# Altium PCB DashboardBoard.PcbDoc
Units mm, origin at the board's own origin, x right, y up, seen from the top; angles counter-clockwise.
Board outline 190 x 53.2 mm, 2 copper layers (Top Layer, Bottom Layer); 92 components, 87 nets, 385 pads, 84 vias.
Unrouted connection lines stored in the file: 8.
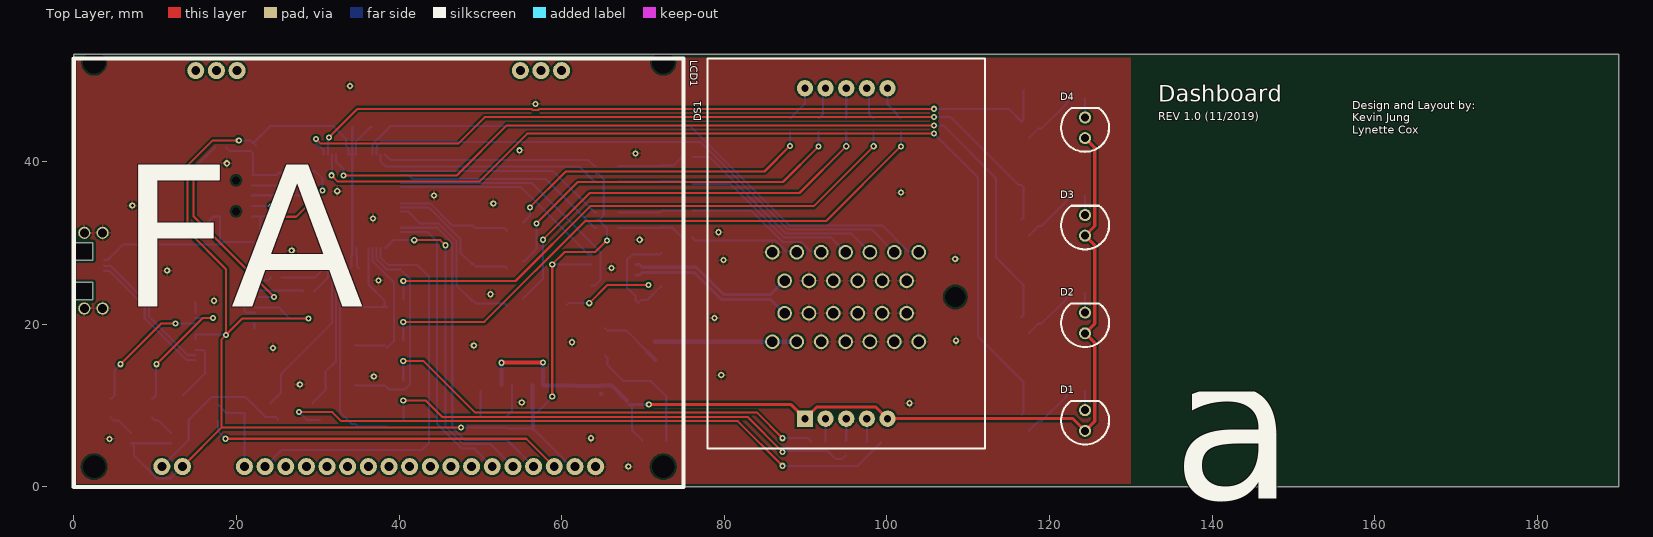
[diagram p0: Top Layer view]
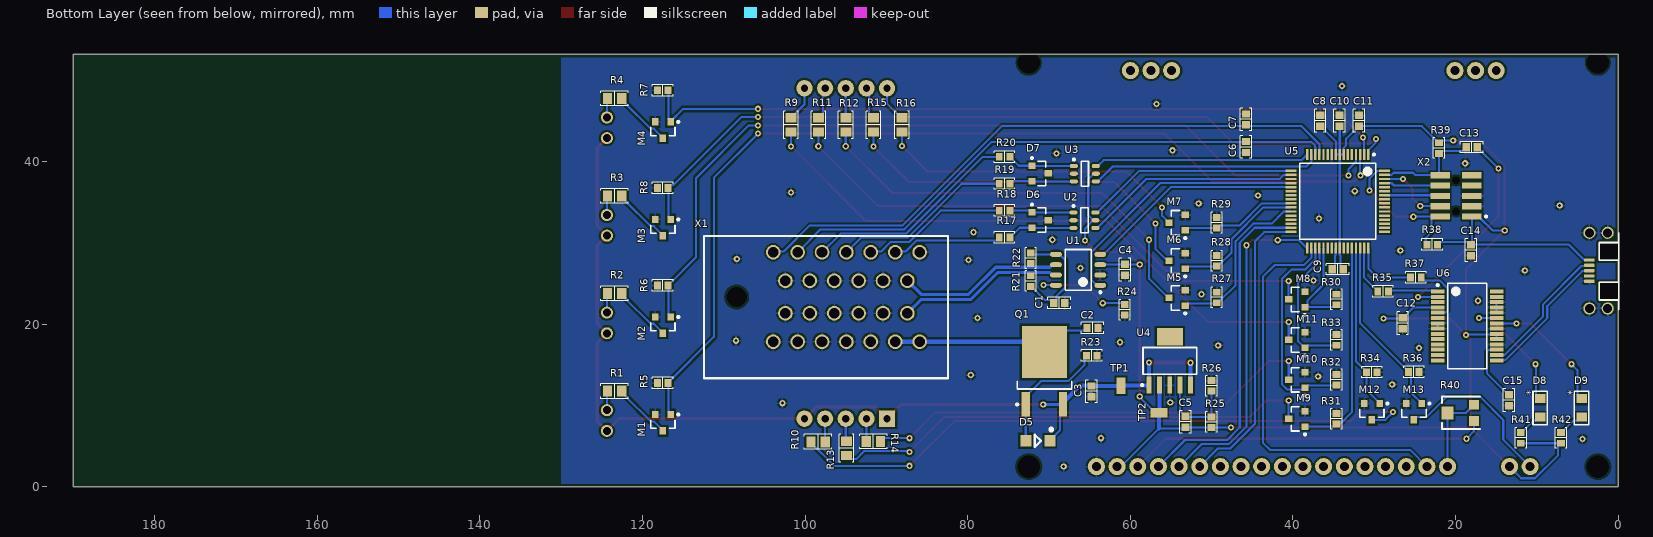
[diagram p1: Bottom Layer view, seen from below]
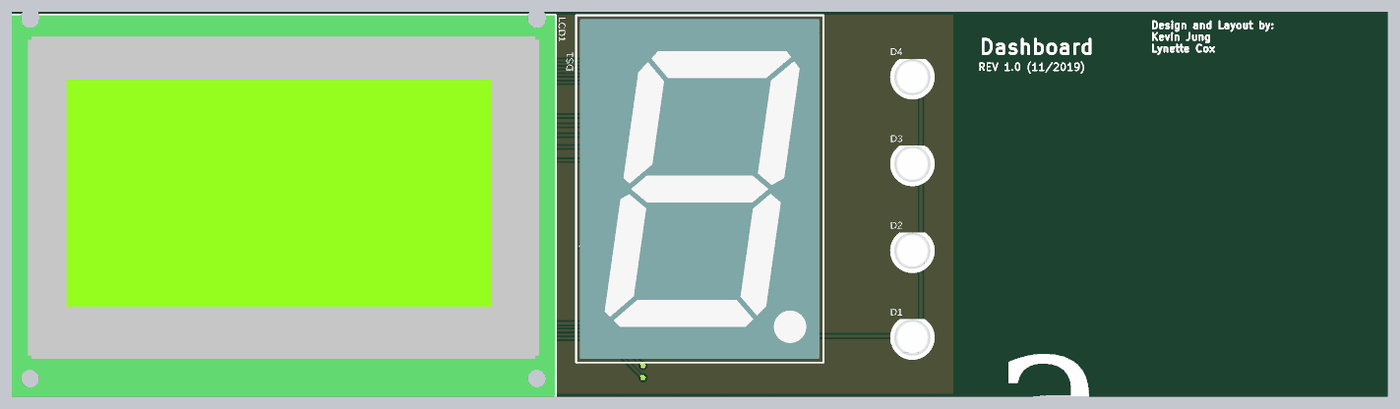
[diagram p2: 3D render of the assembled board from above, using the file's embedded part models]
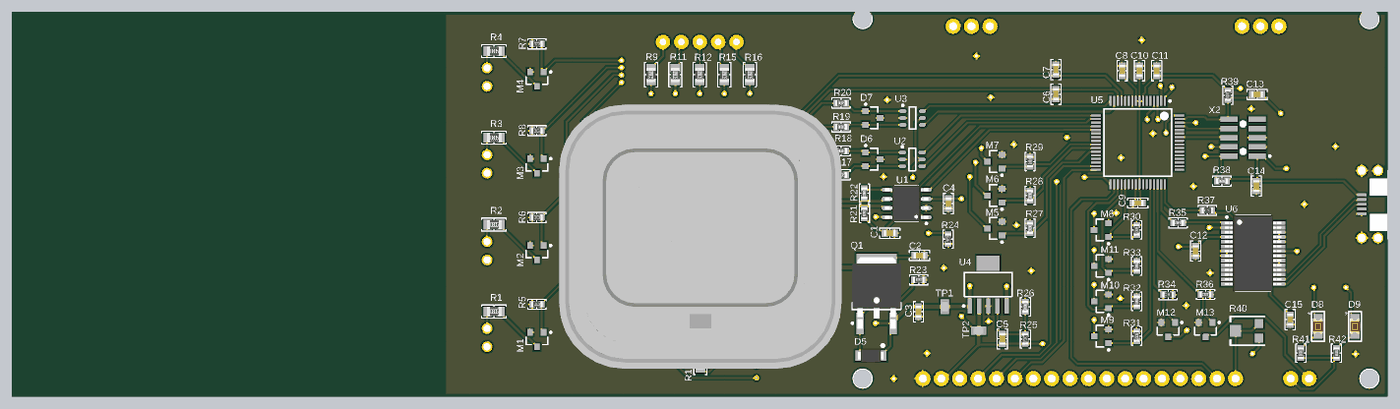
[diagram p3: 3D render of the assembled board from below, using the file's embedded part models]

## Layer stack, top to bottom
Top Solder: solder mask 0.0102, Solder Resist, Dk 3.5
Top Layer: signal copper 0.0356
Dielectric 1: dielectric 0.32, FR-4, Dk 4.8
Bottom Layer: signal copper 0.0356
Bottom Solder: solder mask 0.0102, Solder Resist, Dk 3.5

## Board outline
0,25.15 2.35,25.15 2.35,23 0,23 0,0 190,0 190,53.2 0,53.2 0,30.05 2.35,30.05 2.35,27.9 0,27.9

## Design rules (kind name [scope] priority, off if disabled: settings)
BoardOutlineClearance [All] p1: gap=0.254 ignorepadtopadclearanceinfootprint=FALSE except(0: Arc-SplitContinuation Track-SplitContinuation SMDPad-SplitContinuation THPad-SplitContinuation Via-SplitContinuation Fill-SplitContinuation Poly-SplitContinuation Region-SplitContinuation Text-SplitContinuation; 0.1: Text-OutlineEdge; 0.381: Arc-OutlineEdge Track-OutlineEdge SMDPad-OutlineEdge THPad-OutlineEdge Via-OutlineEdge Fill-OutlineEdge Poly-OutlineEdge Region-OutlineEdge)
Clearance [All] p1: gap=0.254 ignorepadtopadclearanceinfootprint=TRUE except(0: Arc-Hole Track-Hole SMDPad-Hole THPad-Hole Via-Hole Fill-Hole Poly-Hole Region-Hole Text-Hole; 0.203: Arc-Arc Arc-Track Arc-SMDPad Track-Track Track-SMDPad)
DiffPairsRouting [All] p1: maxlimit=0.254 minlimit=0.254 mostfreqgap=0.254 toplayer_minwidth=0.381 toplayer_maxwidth=0.381 toplayer_prefwidth=0.381 bottomlayer_minwidth=0.381 bottomlayer_maxwidth=0.381 bottomlayer_prefwidth=0.381 maxuncoupledlength=12.7
HoleSize [All] p1: absolutevalues=TRUE maxlimit=2.54 minlimit=0.381 maxpercent=80.000 minpercent=20.000
MinimumSolderMaskSliver [All] p1: minsoldermaskwidth=0.1
PolygonConnect [All] p1: connectstyle=Relief reliefconductorwidth=0.254 reliefentries=4 polygonreliefangle="90 Angle" airgapwidth=0.254
RoutingVias [All] p1: holewidth=0.381 width=0.762 viastyle="Through Hole" minholewidth=0.254 minwidth=0.508 maxholewidth=0.711 maxwidth=1.27
SilkToSilkClearance [All] p1: silktosilkclearance=0.1
SilkToSolderMaskClearance [IsPad] p1: minsilkscreentomaskgap=0.1 clearancetoexposedcopper=TRUE
SolderMaskExpansion [All] p1: expansion=0.102
Width [All] p1: maxlimit=0.508 minlimit=0.203 preferedwidth=0.254 minimp=50.000000 maximp=50.000000 favimp=50.000000
25 further rules are at their usual default settings.

## Classes and differential pairs
component class U_12V_to_5V_LDO_1A: C1 C3 R5 R10 TP2 U1
component class U_CAN_5V: C1 C3 R11 R12 R13 U1
component class U_26PinSuperseal: X1
channel class LED_Driver: U_LED_Driver1 U_LED_Driver2 U_LED_Driver3 U_LED_Driver4 U_LED_Driver5 U_LED_Driver6 U_LED_Driver7 U_LED_Driver8 U_LED_Driver9 U_LED_Driver10 U_LED_Driver11 U_LED_Driver12 U_LED_Driver13
component class U_WARNING_LEDS: D5 D7 D8 R4 R10 R13 R23
component class U_RVPOVP: C13 D5 Q1 R23
component class U_MKE1xFxxxVLH: C8 C12 R29 R39 U5 X1
component class U_LED_Driver13: M3 R11
component class U_LED_Driver12: M1 R10
component class U_LED_Driver11: M1 R5
component class U_LED_Driver10: M3 R12
component class U_LED_Driver9: M13 R36
component class U_LED_Driver8: M7 R29
component class U_LED_Driver7: M6 R28
component class U_LED_Driver6: M5 R27
component class U_LED_Driver5: M8 R19
component class U_LED_Driver4: M11 R33
component class U_LED_Driver3: M10 R32
component class U_LED_Driver2: M9 R31
component class U_LED_Driver1: M12 R34
component class U_LCD: R27
component class U_FTDI_USB_UART: C12 C13 C15 D7 D8 R16 R35 R37 R42 U6
component class U_WheelInputConditioning: C13 C15 D7 D8 R19 R27 R28 R29 U5 U6
component class U_7_SEGMENT: DS1 R4 R5 R10 R11 R12 R16 R23
differential pair CAN: +CAN_P -CAN_N

## Components (designator, comment, footprint, x,y, rotation, side; value= is the part's Value field where it differs from the comment)
C1 "capacitor" 0603 68.75,22.6 r180 bottom (schematic designator C4)
C2 "capacitor" 0603 64.65,19.525 r0 bottom (schematic designator C13)
C3 "capacitor" 0603 64.8,11.75 r90 bottom (schematic designator C2)
C4 "capacitor" 0603 60.65,26.7 r90 bottom (schematic designator C3)
C5 "capacitor" 0603 53.2,8 r270 bottom (schematic designator C1)
C6 "capacitor" 0603 45.8,41.8 r270 bottom (schematic designator C14)
C7 "capacitor" 0603 45.8,45.2 r90 bottom (schematic designator C15)
C8 "capacitor" 0603 36.65,45.05 r270 bottom (schematic designator C11)
C9 "capacitor" 0603 34.5,26.775 r180 bottom (schematic designator C12)
C10 "capacitor" 0603 34.263,45.05 r270 bottom (schematic designator C9)
C11 "capacitor" 0603 31.875,45.05 r270 bottom (schematic designator C8)
C12 "capacitor" 0603 26.5,20.125 r90 bottom (schematic designator C5)
C13 "capacitor" 0603 18,41.775 r180 bottom (schematic designator C6)
C14 "capacitor" 0603 18.125,29.125 r90 bottom (schematic designator C10)
C15 "capacitor" 0603 13.45,10.661 r90 bottom (schematic designator C7)
D1 "LED" "LED TH" 124.374,8.169 r90 top locked (schematic designator D6)
D2 "LED" "LED TH" 124.374,20.169 r90 top locked (schematic designator D7)
D3 "LED" "LED TH" 124.374,32.169 r90 top locked (schematic designator D4)
D4 "LED" "LED TH" 124.374,44.169 r90 top locked (schematic designator D5)
D5 "" SOD123F 71.375,5.675 r180 bottom (schematic designator D3)
D6 "AZ23C4V7-7-F Dual Zenner Diodes" SOT23-3 71.1,32.825 r180 bottom (schematic designator D8)
D7 "AZ23C4V7-7-F Dual Zenner Diodes" SOT23-3 71.1,38.55 r180 bottom (schematic designator D9)
D8 "LED" 0805_LED 9.6,9.725 r90 bottom (schematic designator D1)
D9 "LED" 0805_LED 4.5,9.725 r90 bottom (schematic designator D2)
DS1 "" SA15-11EWA 89.92,8.393 r0 top locked
LCD1 "" CFAG12864S 0,0 r0 top locked
M1 "" SOT23-3 117.5,7.899 r270 bottom
M2 "" SOT23-3 117.5,19.899 r270 bottom (schematic designator M1)
M3 "" SOT23-3 117.5,31.899 r270 bottom (schematic designator M1)
M4 "" SOT23-3 117.5,43.899 r270 bottom (schematic designator M1)
M5 "" SOT23-3 54.25,23.248 r0 bottom (schematic designator M1)
M6 "" SOT23-3 54.25,27.798 r0 bottom (schematic designator M1)
M7 "" SOT23-3 54.25,32.498 r0 bottom (schematic designator M1)
M8 "" SOT23-3 39.532,23.053 r0 bottom (schematic designator M1)
M9 "" SOT23-3 39.526,8.375 r0 bottom (schematic designator M1)
M10 "" SOT23-3 39.525,13.177 r0 bottom (schematic designator M1)
M11 "" SOT23-3 39.525,18.075 r0 bottom (schematic designator M1)
M12 "" SOT23-3 30.3,9.252 r270 bottom (schematic designator M1)
M13 "" SOT23-3 25.131,9.252 r270 bottom (schematic designator M1)
Q1 "DMP3010LK3-13" DMP3010LK3-13 70.575,14.25 r90 bottom
R1 "820" "RES 0805/2012" 123.425,11.775 r180 bottom (schematic designator R25)
R2 "820" "RES 0805/2012" 123.425,23.8 r180 bottom (schematic designator R26)
R3 "820" "RES 0805/2012" 123.425,35.8 r180 bottom (schematic designator R23)
R4 "820" "RES 0805/2012" 123.425,47.768 r180 bottom (schematic designator R24)
R5 "10k" "RES 0603/1608" 117.5,12.774 r180 bottom (schematic designator R19)
R6 "10k" "RES 0603/1608" 117.5,24.774 r180 bottom (schematic designator R19)
R7 "10k" "RES 0603/1608" 117.5,48.774 r180 bottom (schematic designator R19)
R8 "10k" "RES 0603/1608" 117.5,36.774 r180 bottom (schematic designator R19)
R9 "470" "RES 0805/2012" 101.725,44.525 r270 bottom (schematic designator R8)
R10 "470" "RES 0805/2012" 98.4,5.55 r180 bottom (schematic designator R7)
R11 "470" "RES 0805/2012" 98.375,44.525 r270 bottom (schematic designator R6)
R12 "680" "RES 0805/2012" 95,44.525 r270 bottom (schematic designator R5)
R13 "470" "RES 0805/2012" 94.92,4.75 r90 bottom (schematic designator R4)
R14 "470" "RES 0805/2012" 91.6,5.575 r0 bottom (schematic designator R2)
R15 "470" "RES 0805/2012" 91.6,44.525 r270 bottom (schematic designator R3)
R16 "470" "RES 0805/2012" 88.075,44.525 r270 bottom (schematic designator R1)
R17 "1k" "RES 0603/1608" 75.475,30.667 r180 bottom (schematic designator R28)
R18 "1k" "RES 0603/1608" 75.475,33.975 r180 bottom (schematic designator R27)
R19 "1k" "RES 0603/1608" 75.475,37.283 r180 bottom (schematic designator R30)
R20 "1k" "RES 0603/1608" 75.475,40.592 r180 bottom (schematic designator R29)
R21 "62" "RES 0603/1608" 72.25,25.325 r270 bottom (schematic designator R12)
R22 "62" "RES 0603/1608" 72.25,28.125 r270 bottom (schematic designator R11)
R23 "10k" "RES 0603/1608" 64.75,16.15 r0 bottom (schematic designator R22)
R24 "100" "RES 0603/1608" 60.69,21.775 r90 bottom (schematic designator R13)
R25 "43k" "RES 0603/1608" 50.025,7.975 r270 bottom (schematic designator R9)
R26 "15k" "RES 0603/1608" 50.025,12.425 r270 bottom (schematic designator R10)
R27 "10k" "RES 0603/1608" 49.375,23.298 r270 bottom (schematic designator R19)
R28 "10k" "RES 0603/1608" 49.375,27.798 r270 bottom (schematic designator R19)
R29 "10k" "RES 0603/1608" 49.375,32.498 r270 bottom (schematic designator R19)
R30 "10k" "RES 0603/1608" 34.657,23.053 r270 bottom (schematic designator R19)
R31 "10k" "RES 0603/1608" 34.651,8.375 r270 bottom (schematic designator R19)
R32 "10k" "RES 0603/1608" 34.65,13.177 r270 bottom (schematic designator R19)
R33 "10k" "RES 0603/1608" 34.65,18.075 r270 bottom (schematic designator R19)
R34 "10k" "RES 0603/1608" 30.3,14.1 r0 bottom (schematic designator R19)
R35 "1k" "RES 0603/1608" 28.925,24.025 r0 bottom (schematic designator R15)
R36 "10k" "RES 0603/1608" 25.131,14.127 r0 bottom (schematic designator R19)
R37 "1k" "RES 0603/1608" 24.875,25.75 r0 bottom (schematic designator R14)
R38 "10k" "RES 0603/1608" 22.875,29.8 r180 bottom (schematic designator R20)
R39 "10k" "RES 0603/1608" 22.05,41.675 r90 bottom (schematic designator R21)
R40 "TC33X-2-103E" 35WR 19.35,9.1 r90 bottom (schematic designator R18)
R41 "1k" "RES 0603/1608" 11.975,6.025 r270 bottom (schematic designator R16)
R42 "1k" "RES 0603/1608" 7.05,6.025 r270 bottom (schematic designator R17)
TP1 "RCU-0C" RCU-0C 61.15,12.45 r0 bottom (schematic designator TP2)
TP2 "RCU-0C" RCU-0C 56.475,9.125 r90 bottom (schematic designator TP1)
U1 "MCP2561 CAN Transceiver" SOIC-8 66.425,26.7 r0 bottom (schematic designator U2)
U2 "74LVC2G17GW" TSOP95P280X110-6N 65.65,32.8 r180 bottom (schematic designator U5)
U3 "74LVC2G17GW" TSOP95P280X110-6N 65.6,38.52 r180 bottom (schematic designator U6)
U4 "LDO-5Pin" SOT223-5 55.15,15.5 r90 bottom (schematic designator U1)
U5 "MKE18F512VLH16" TQFP64 34.5,35.125 r270 bottom (schematic designator U4)
U6 "FT232RL" SSOP-28 18.575,19.8 r180 bottom (schematic designator U3)
X1 "" TE_Amp_6437288-6 94.92,23.364 r270 bottom locked (schematic designator X2)
X2 "CN-2P-M-R10" HDR2X5_SMT 19.95,35.8 r90 bottom (schematic designator X1)

## Footprints (in the part's own frame and the unit in brackets; to place one, negate y for a bottom-side part, rotate by r counter-clockwise, add the part's x,y. Pads: shape width x height; smd on the part's side, far side on the other; paste and mask are expansions set on the pad)
35WR [mm]
  rect 1.2x1.2 smd: 1(-1,-1.6) 3(1,-1.6)
  rect 1.6x1.5 smd: 2(0,1.65)
  silkscreen extent -2,-2.35 2,2.35
0603 [mm]
  rect 0.9x1 smd: 1(-0.675,0) 2(0.675,0)
  silkscreen extent -1.4,-0.7 1.4,0.7, body extent -0.8,-0.41 0.8,0.41, height 0.82
0805_LED [mm]
  rect 1.1x1.3 smd: 1(-1.15,0) 2(1.15,0)
  silkscreen extent -2.06,-0.89 2.03,0.89, body extent -1.05,-0.67 1.05,0.67, height 0.9
CFAG12864S [mm]
  round 2.1 hole 1.1: 1(64.17,2.5) 2(61.63,2.5) 3(59.09,2.5) 4(56.55,2.5) 5(54.01,2.5) 6(51.47,2.5) 7(48.93,2.5) 8(46.39,2.5) 9(43.85,2.5) 10(41.31,2.5) 11(38.77,2.5) 12(36.23,2.5) 13(33.69,2.5) 14(31.15,2.5) 15(28.61,2.5) 16(26.07,2.5) 17(23.53,2.5) 18(20.99,2.5) 19(13.37,2.5) 20(10.83,2.5) ""(15,51.2) ""(17.54,51.2) ""(20.08,51.2) ""(54.92,51.2) ""(57.46,51.2) ""(60,51.2)
  round 0 hole 2.75: 21(2.5,52.2) 22(72.5,52.2) 23(72.5,2.5) 24(2.5,2.5)
  silkscreen extent 0,0 75,52.7, body extent 0,0 75,52.7, height 8.9
DMP3010LK3-13 [mm] "D-PAK, 3-Pads, Body 6.20x6.71mm (max), IPC Medium Density"
  rect 3x1 smd: 1(-4.1,2.29) 2(-4.1,-2.29)
  rect 6.4x5.55 smd: 3(2.35,0)
  silkscreen extent -4.22,-3.35 -1.25,3.47, body extent -4.86,-3.35 5.04,3.35, height 2.39
HDR2X5_SMT [mm] "Header, 10-Leads, Body 3.43x6.35mm, Pitch 1.27mm"
  rect 0.76x2.4 smd: 1(-2.54,-1.95) 2(-2.54,1.95) 3(-1.27,-1.95) 4(-1.27,1.95) 5(0,-1.95) 6(0,1.95) 7(1.27,-1.95) 8(1.27,1.95) 9(2.54,-1.95) 10(2.54,1.95)
  round 0 hole 1 unplated: MH1(-1.905,0) MH2(1.905,0)
  silkscreen extent -2.66,-3.82 -2.42,-3.57, body extent -3.17,-1.72 3.17,1.72, height 4.55
"LED TH" [mm]
  round 1.48 hole 0.98: 1(-1.27,0) 2(1.27,0)
  silkscreen extent -2.95,-2.95 2.42,2.95, body extent -3,-3 2.5,3, height 8.8
RCU-0C [mm]
  rect 1.15x2.05 smd: 1(0,0)
  body extent -0.6,-0.78 0.6,0.82, height 1.16
"RES 0603/1608" [mm] "Chip Resistor, 2-Leads, Body 1.60x0.80mm, IPC Medium Density"
  rect 0.85x0.95 smd: 1(-0.65,0) 2(0.65,0)
  silkscreen extent -1.27,-0.7 1.27,0.7, body extent -0.8,-0.4 0.8,0.4, height 0.45
"RES 0805/2012" [mm] "Chip Resistor, 2-Leads, Body 2.00x1.25mm, IPC Medium Density"
  rect 1.15x1.35 smd: 1(-0.875,0) 2(0.875,0)
  silkscreen extent -1.7,-0.9 1.7,0.9, body extent -0.95,-0.62 1.05,0.63, height 0.6
SA15-11EWA [mm]
  rect 2x2 hole 0.9: 1(0,0)
  round 2 hole 0.9: 2(2.54,0) 3(5.08,0) 4(7.62,0) 5(10.16,0) 6(10.16,40.64) 7(7.62,40.64) 8(5.08,40.64) 9(2.54,40.64) 10(0,40.64)
  silkscreen extent -12,-3.68 22.16,44.32, body extent -11.5,-3.18 21.65,43.82, height 12.5
SOD123F [mm] "SODFL, 2-Leads, Body 1.80x3.50mm, IPC Low Density"
  rect 1.35x1.45 smd: 1(-1.475,0) 2(1.475,0)
  silkscreen extent -0.38,-0.76 1.75,1.5, body extent -1.75,-0.95 1.75,0.95, height 1.15
SOIC-8 [mm] "SOIC, 8-Leads, Body 4.90x3.90mm, Pitch 1.27mm, IPC Medium Density"
  oval 1.45x0.6 smd: 1(-2.725,1.905) 2(-2.725,0.635) 3(-2.725,-0.635) 4(-2.725,-1.905) 5(2.725,-1.905) 6(2.725,-0.635) 7(2.725,0.635) 8(2.725,1.905)
  silkscreen extent -2.85,-2.5 1.6,2.88, body extent -3,-2.5 3,2.5, height 1.75
SOT23-3 [mm] "SOT23, 3-Leads, Body 2.92x2.37mm, Pitch 0.95mm, IPC Medium Density, NUP2105L"
  rect 0.9x0.8 smd: 1(-1,0.95) 2(-1,-0.95) 3(1,0)
  silkscreen extent -1.13,-1.5 0.7,2.02, body extent -0.7,-1.52 0.7,1.52, height 1.11
SOT223-5 [mm] "SOT223-5 TPS7A45 Low-dropout regulator"
  rect 2.1x0.6 smd: 1(-2.975,2.54) 2(-2.975,1.27) 3(-2.975,0) 4(-2.975,-1.27) 5(-2.975,-2.54)
  rect 2.1x3.2 smd: ""(2.975,0)
  silkscreen extent -3.1,-3.3 1.65,3.52, body extent -1.78,-3.27 1.78,3.27, height 1.8
SSOP-28 [mm] "hi"
  rect 1.65x0.49 smd: 1(-3.625,4.225) 2(-3.625,3.575) 3(-3.625,2.925) 4(-3.625,2.275) 5(-3.625,1.625) 6(-3.625,0.975) 7(-3.625,0.325) 8(-3.625,-0.325) 9(-3.625,-0.975) 10(-3.625,-1.625) 11(-3.625,-2.275) 12(-3.625,-2.925) 13(-3.625,-3.575) 14(-3.625,-4.225) 15(3.625,-4.225) 16(3.625,-3.575) 17(3.625,-2.925) 18(3.625,-2.275) 19(3.625,-1.625) 20(3.625,-0.975) 21(3.625,-0.325) 22(3.625,0.325) 23(3.625,0.975) 24(3.625,1.625) 25(3.625,2.275) 26(3.625,2.925) 27(3.625,3.575) 28(3.625,4.225)
  silkscreen extent -3.75,-5.25 2.4,5.25, body extent -3.9,-5.25 3.9,5.25, height 2
TE_Amp_6437288-6 [mm] "TE_Amp_6437288-6"
  round 1.8 hole 1.3: 1(5.5,9) 2(5.5,6) 3(5.5,3) 4(5.5,0) 5(5.5,-3) 6(5.5,-6) 7(5.5,-9) 8(2,7.5) 9(2,4.5) 10(2,1.5) 11(2,-1.5) 12(2,-4.5) 13(2,-7.5) 14(-2,7.5) 15(-2,4.5) 16(-2,1.5) 17(-2,-1.5) 18(-2,-4.5) 19(-2,-7.5) 20(-5.5,9) 21(-5.5,6) 22(-5.5,3) 23(-5.5,0) 24(-5.5,-3) 25(-5.5,-6) 26(-5.5,-9)
  round 0 hole 2.5: 27(0,-13.5)
  silkscreen extent -7.5,-17.5 10,12.5, body extent -17,-19.5 19.5,19.5, height 24.71
TQFP64 [mm] "TSQFP, 64-Leads, Body 10.00x10.00mm, Pitch 0.50mm, IPC Medium Density, MKE18F512VLH16"
  rect 1.35x0.3 smd: 1(-5.75,3.75) 2(-5.75,3.25) 3(-5.75,2.75) 4(-5.75,2.25) 5(-5.75,1.75) 6(-5.75,1.25) 7(-5.75,0.75) 8(-5.75,0.25) 9(-5.75,-0.25) 10(-5.75,-0.75) 11(-5.75,-1.25) 12(-5.75,-1.75) 13(-5.75,-2.25) 14(-5.75,-2.75) 15(-5.75,-3.25) 16(-5.75,-3.75) 33(5.75,-3.75) 34(5.75,-3.25) 35(5.75,-2.75) 36(5.75,-2.25) 37(5.75,-1.75) 38(5.75,-1.25) 39(5.75,-0.75) 40(5.75,-0.25) 41(5.75,0.25) 42(5.75,0.75) 43(5.75,1.25) 44(5.75,1.75) 45(5.75,2.25) 46(5.75,2.75) 47(5.75,3.25) 48(5.75,3.75)
  rect 0.3x1.35 smd: 17(-3.75,-5.75) 18(-3.25,-5.75) 19(-2.75,-5.75) 20(-2.25,-5.75) 21(-1.75,-5.75) 22(-1.25,-5.75) 23(-0.75,-5.75) 24(-0.25,-5.75) 25(0.25,-5.75) 26(0.75,-5.75) 27(1.25,-5.75) 28(1.75,-5.75) 29(2.25,-5.75) 30(2.75,-5.75) 31(3.25,-5.75) 32(3.75,-5.75) 49(3.75,5.75) 50(3.25,5.75) 51(2.75,5.75) 52(2.25,5.75) 53(1.75,5.75) 54(1.25,5.75) 55(0.75,5.75) 56(0.25,5.75) 57(-0.25,5.75) 58(-0.75,5.75) 59(-1.25,5.75) 60(-1.75,5.75) 61(-2.25,5.75) 62(-2.75,5.75) 63(-3.25,5.75) 64(-3.75,5.75)
  silkscreen extent -5.87,-4.67 4.67,4.68, body extent -5,-5 5,5, height 1.6
TSOP95P280X110-6N [mm] "TSOP, 6-Leads, Body 2.90x1.50mm, Pitch 0.95mm, IPC Medium Density"
  oval 1x0.5 smd: 1(-1.35,0.95) 2(-1.35,0) 3(-1.35,-0.95) 4(1.35,-0.95) 5(1.35,0) 6(1.35,0.95)
  silkscreen extent -1.48,-1.55 0.45,1.87, body extent -0.85,-1.55 0.85,1.55, height 1.1

## Part data
C1: library part 1, "Generic 0603 capacitor", capacitance=4700pF, Dielectric=Ceramic, package=0603, percent tolerance=10, voltage=50, ESR=1, id=1, name="0603 Capacitor", quantity=0
C2 C5: library part 1, "Generic 0603 capacitor", capacitance=0.01uF, Dielectric=Ceramic, package=0603, percent tolerance=10, voltage=50, ESR=1, id=1, name="0603 Capacitor", quantity=0
C3 C4 C8 C9 C10 C11 C14: library part 1, "Generic 0603 capacitor", capacitance=0.1uF, Dielectric=Ceramic, package=0603, percent tolerance=10, voltage=50, ESR=1, id=1, name="0603 Capacitor", quantity=0
C6 C7: library part 1, "Generic 0603 capacitor", capacitance=1uF, Dielectric=Ceramic, package=0603, percent tolerance=10, voltage=50, ESR=1, id=1, name="0603 Capacitor", quantity=0
C12 C13 C15: library part 1, "Generic 0603 capacitor", capacitance=0.1uF, id=1
D1 D2 D3 D4: library part 23, "Thru Hole LED", createdby=Andrew, createddate="10/16/2019 10:17:38 PM", id=23, name=LED, numcircuits=1, quantity=1, updatedby=Andrew, updateddate="10/16/2019 10:17:38 PM", vr=2.59999990463257
D5: library part 10, "Zener Diode 14V 500mW ±5% Surface Mount SOD-1", package=SOD-123, id=10, link=https://www.digikey.com/product-detail/en/diodes-incorporated/DDZ9701-7/DDZ9701-7DICT-ND/3877402, name=DDZ9701, quantity=0
D6: library part 14, "DIODE ZENER ARRAY 4.7V SOT23-3", id=14
D7: library part 14, "DIODE ZENER ARRAY 4.7V SOT23-3", package=SOT23-3, id=14, link=https://www.digikey.com/product-detail/en/diodes-incorporated/AZ23C4V7-7-F/AZ23C4V7-FDICT-ND/815309, name=AZ23C4V7-7-F, quantity=0
D8 D9: library part 19, "Generic 0805 LED", id=19
DS1: library part 40, "7SEG DISPLAY 1DIGIT RED 1.5\" CA", voltageinmax=5, createdby=Kevin, id=40, link=https://www.digikey.com/short/pdvmpz, name=SA15-11EWA, quantity=0, vcc=4
LCD1: library part 41, "Sunlight Readable 128x64 SPI or Parallel Graphic LCD", voltageinmax=5.5, createdby=Kevin, id=41, link=https://www.crystalfontz.com/product/cfag12864syyhvt-lcd-graphical-128x64, name=CFAG12864S, quantity=0, vcc=5
M1 M2 M3 M4 M5 M6 M7 M8 M9 M10 M11 M12 M13: library part 6, "MOSFET N-CHANNEL 30V 5A SOT23", current=2.8A, package=SOT-23, id=6, link=https://www.digikey.com/product-detail/en/diodes-incorporated/DMG2302UK-7/DMG2302UK-7DICT-ND/6010163, name=DMG2302UK-7, numcircuits=1, quantity=0, rdson=90mOhm, Type=N_Channel, vdsmax=0, vgsmax=1, vt=800
Q1: library part 26, "P-Channel MOSFET 30V 17A TO252", current=17A, Manufacturer_id=1, package=TO-252-3, createdby=Kevin, Drawer_id=1, id=26, idFuse=3, link=https://www.digikey.com/product-detail/en/diodes-incorporated/DMP3010LK3-13/DMP3010LK3-13DICT-ND/3076574, name=DMP3010LK3-13, numcircuits=1, quantity=0, rdson=8mOhm, Type=P_Channel, vdsmax=30, vgsmax=20
R1 R2 R3 R4 R9 R10 R11 R12 R13 R14 R15 R16: library part 2, package=0805, percent tolerance=5, Power=1/4, createdby=Kevin, id=2, name="0805 Resistor", quantity=0
  R1 R2 R3 R4: resistance=820
  R9 R10 R11 R13 R14 R15 R16: resistance=470
  R12: resistance=680
R5 R6 R7 R8 R21 R22 R23 R24 R25 R26 R27 R28 R29 R30 R31 R32 R33 R34 R35 R36 R37 R38 R39 R41 R42: library part 1, package=0603, percent tolerance=5, id=1, name="0603 Resistor", quantity=0
  R5 R6 R7 R8 R23 R27 R28 R29 R30 R31 R32 R33 R34 R36 R38 R39: resistance=10k
  R21 R22: resistance=62
  R24: resistance=100
  R25: resistance=43k
  R26: resistance=15k
  R35 R37 R41 R42: resistance=1k
R17 R18 R19 R20: library part 1, id=1, resistance=1k
R40: library part 1, "TRIMMER 10K OHM 0.1W J LEAD TOP", package="SOD-23 Bourns", resistance=10, voltage=50, createdby=Kevin, createddate=10/15/2019, Digi-Key_Part_Number=TC33X-103ECT-ND, Digi-Key_Purchase_URL=https://www.digikey.com/product-detail/en/bourns-inc/TC33X-2-103E/TC33X-103ECT-ND/612911?utm_source=snapeda&utm_medium=aggregator&utm_campaign=symbol, id=1, link=https://www.digikey.com/product-detail/en/bourns-inc/TC33X-2-103E/TC33X-103ECT-ND/612911, MF=Bourns, MP=TC33X-2-103E, name=TC33X-2-103E, numcontacts=3, numrows=0, Pitch=0, quantity=0, SnapEDA_Link=https://www.snapeda.com/parts/TC33X-2-103E/Bourns/view-part/?ref=snap
TP1 TP2: library part 14, id=14, link=https://www.digikey.com/product-detail/en/te-connectivity-amp-connectors/RCU-0C/A106145CT-ND/3477802, name=RCU-0C, numcontacts=1, numrows=1, quantity=0
U1: library part 5, package=SOIC-8, id=5, link=https://www.digikey.com/product-detail/en/microchip-technology/MCP2561T-E-SN/MCP2561T-E-SNCT-ND/5148846, name=null, quantity=0, Type=CAN, vcc=0
U2 U3: library part 17, "Buffer, Non-Inverting 2 Element 1 Bit per Element Push-Pull Output 6-TSSOP", package=SOT457, createdby=Nolan, createddate="10/16/2019 10:08:58 PM", id=17, name=74LVC2G17, quantity=0, Type=buffer, updatedby=Nolan, updateddate="10/16/2019 10:08:58 PM", vcc=5
U4: library part 7, "1.3V-5V 1.A", package=SOT-223-6, id=7, imax=1, link=https://www.digikey.com/product-detail/en/texas-instruments/REG104GA-A/REG104GA-A-ND/380288?utm_adgroup=Integrated%20Circuits&slid=&gclid=CjwKCAjwpKveBRAwEiwAo4Pqm3P1cbCGhU8VzQ4hsaig_pQLQzWQ1vPK7ianKpgKPxk_g8_0T-ULMBoCGh8QAvD_BwE, name=REG104GA-A, quantity=0
U5: library part 1, "32b NXP Microcontroller", package=TQFP64, voltagemax=5.5, voltagemin=2.70000004768372, id=1, name=MKE18F512VLH16, quantity=0
U6: library part 3, id=3
X1: library part 7, "AMP SuperSeal Straight", id=7, link=https://www.digikey.com/product-detail/en/te-connectivity-amp-connectors/6437288-6/A123256-ND/2329274, name=6437288-6, numcontacts=26, numrows=4, Pitch=3mm, quantity=0
X2: library part 4, "CONN_TE_2X5POS", id=4, link=https://www.digikey.com/product-detail/en/5103309-1/A33160-ND/1114898?utm_campaign=buynow&WT.z_cid=ref_octopart_dkc_buynow&utm_medium=aggregator&curr=usd&site=us&utm_source=octopart, name=5103309-1, numcontacts=10, numrows=2, Pitch=2.54mm, quantity=0

## Free pads (board coordinates)
  round 1.5 hole 1.1: 0(1.3,21.95) 0(1.3,31.25) 0(3.55,21.95) 0(3.55,31.25)
  rrect50% 1.3x0.4 smd far side: 1(3.55,27.9) 2(3.55,27.25) 3(3.55,26.6) 4(3.55,25.95) 5(3.55,25.3)

## Via types
v1: diameter 0.762, hole 0.381, Top Layer to Bottom Layer, 84 vias

## Nets (pads, with @x,y where several pads share a name; then routed paths per layer and width w, separated by ;. In a path a pad name is that pad's centre, name@x,y a point inside that pad or via, vN(x,y) a via of type N, cw(c..) or ccw(c..) an arc to the next point about the centre after c; other vN are vias at no path point)
3V3_OUT: C15.2 U6.17 | length 7.8
  Bottom Layer w0.254: C15.2@13.45,11.275 13.45,11.286 16.156,13.992 16.156,16.628 15.933,16.851 14.974,16.851 U6.17
5V: C4.2 C5.2 C8.2 C9.2 C10.2 C11.2 C12.2 C14.2 LCD1.2 LCD1.19 pad.1 R25.2 R38.2 R39.2 R41.2 R42.2 TP2.1 U1.3 U2.5 U3.5 U4.2 U5.7 U5.8 U5.9 U5.41 U6.4 U6.19 U6.20 X2.1 | length 246.4
  Top Layer w0.254: LCD1.19 18.195,7.325 ; v1(20.3,42.625) 17.097,42.625 13.963,39.491 v1(13.963,31.545) 18.725,26.783 v1(18.725,18.7) ; v1(28.875,20.725) 20.75,20.725 v1(18.725,18.7) ; v1(47.625,7.325) 18.195,7.325 ; v1(58.85,11.125) v1(58.85,27.375) 60.375,28.9 64.156,28.9 v1(65.575,30.319) ; 18.195,7.325 18.195,18.152 18.725,18.682 v1(18.725,18.7)
  Bottom Layer w0.254: pad.1@3.7,27.9 4.15,27.9 6.05,29.8 C14.2@18.05,29.8 ; R42.2 R42.2@7.1,5.375 ; R41.2 R42.2@7.1,5.375 ; LCD1.19 11.939,1.069 10.237,1.069 7.398,3.908 7.398,5.077 R42.2@7.1,5.375 ; v1(13.963,31.545) 15.465,31.545 17.18,33.26 X2.1 18,29.85 C14.2@18.05,29.8 ; U6.19 U6.20 15.012,18.763 18.662,18.763 v1(18.725,18.7) ; C14.2 C14.2@18.05,29.8 ; v1(20.3,42.625) 21.7,42.625 22,42.325 R39.2 22.1,42.325 24.15,44.375 C11.2 31.925,44.375 33.462,42.838 33.462,42.027 33.781,41.708 U5.7@33.781,40.875 ; U6.4 25.175,22.075 26.525,20.725 v1(28.875,20.725) ; R39.2@22.3,42.125 R39.2@22.398,42.027 ; R38.2@22.375,29.75 22.375,29.8 22.077,30.098 18.348,30.098 C14.2@18.05,29.8 ; U5.7 U5.7@33.781,40.875 ; C9.2 34.148,27.098 34.148,28.409 34.25,28.511 U5.41 U5.8 ; C10.2@34.262,44.25 34.25,44.237 U5.8 ; C8.2@36.65,44.25 36.475,44.25 34.719,42.494 34.719,40.875 U5.8 ; v1(47.625,7.325) R25.2 C5.2 53.35,7.175 56.5,7.175 ; 56.46,7.215 56.5,7.175 ; TP2.1 56.925,9.125 58.85,11.05 v1(58.85,11.125) ; v1(58.85,27.375) C4.2 60.69,27.335 U1.3 ; LCD1.2 61.175,2.5 56.5,7.175 ; U3.5 64.5,38.52 65.181,37.839 65.181,33.431 U2.5@64.55,32.8 ; U2.5 U2.5@64.55,32.8 ; v1(65.575,30.319) 65.575,31.775 U2.5@64.55,32.8 ; U5.7@33.781,40.875 U5.8
  Bottom Layer w0.508: TP2.1@56.42,9.165 U4.2 ; 56.46,7.215 TP2.1@56.46,9.045
7SEG_a: DS1.7 R11.1 | length 4
  Bottom Layer w0.254: DS1.7 97.827,48.746 97.827,45.848 98.275,45.4 R11.1
7SEG_a_SIG: M8.1 R30.2 U5.37 | length 12.2
  Bottom Layer w0.254: R30.2 34.955,22.105 38.53,22.105 M8.1 ; U5.37 36.25,24.896 38.209,22.937 38.209,22.376 M8.1@38.48,22.105
7SEG_b: DS1.6 R9.1 | length 4.4
  Bottom Layer w0.254: DS1.6 100.08,47.045 101.177,45.948 101.177,45.848 101.625,45.4 R9.1
7SEG_b_SIG: M11.1 R33.2 U5.36 | length 17.7
  Bottom Layer w0.254: R33.2 34.677,17.398 38.252,17.398 M11.1 38.575,17.125 39.363,17.913 39.363,25.15 36.758,27.755 36.758,27.935 36.75,27.943 U5.36
7SEG_c: DS1.4 R10.2 | length 2.8
  Bottom Layer w0.254: R10.2 97.54,5.565 DS1.4
7SEG_c_SIG: M12.1 R34.2 U5.45 | length 20.3
  Bottom Layer w0.254: M12.1 29.35,10.302 30.95,11.902 R34.2 30.95,14.15 32.25,15.45 U5.45
7SEG_d: DS1.3 R13.2 | length 2.8
  Bottom Layer w0.254: R13.2 95,5.705 DS1.3
7SEG_d_SIG: M9.1 R31.2 U5.44 | length 26.7
  Bottom Layer w0.254: U5.44 32.75,28.511 32.758,28.503 32.758,9.192 34.225,7.725 R31.2 34.949,7.427 38.526,7.427 M9.1
7SEG_DP: DS1.8 R12.1 | length 3.6
  Bottom Layer w0.254: R12.1 DS1.8
7SEG_DP_SIG: M5.1 R27.2 U5.27 | length 21
  Bottom Layer w0.254: U5.27 41.114,33.875 42.606,32.383 44.91,32.383 47.058,30.235 47.058,24.826 48.938,22.946 49.077,22.946 R27.2 49.452,22.571 52.977,22.571 M5.1
7SEG_e: DS1.2 R14.2 | length 2.8
  Bottom Layer w0.254: DS1.2 92.46,5.59 R14.2
7SEG_e_SIG: M10.1 R32.2 U5.35 | length 26.6
  Bottom Layer w0.254: R32.2 34.677,12.5 38.252,12.5 M10.1 38.752,12 40.737,12 41.363,12.626 41.363,25.578 40.175,26.767 38.465,26.767 37.25,27.982 U5.35
7SEG_f: DS1.9 R15.1 | length 4
  Bottom Layer w0.254: R15.1 91.7,45.4 92.148,45.848 92.148,48.721 DS1.9
7SEG_f_SIG: M6.1 R28.2 U5.26 | length 17.1
  Bottom Layer w0.254: U5.26 43.637,34.375 47.566,30.446 47.566,28.818 48.938,27.446 49.077,27.446 R28.2 49.402,27.121 52.977,27.121 M6.1
7SEG_g: DS1.10 R16.1 | length 4.5
  Bottom Layer w0.254: R16.1 88.175,45.4 89.92,47.145 DS1.10
7SEG_g_SIG: M7.1 R29.2 U5.25 | length 14.4
  Bottom Layer w0.254: U5.25 41.114,34.875 41.122,34.883 43.847,34.883 46.584,32.146 49.077,32.146 49.402,31.821 52.977,31.821 M7.1
12V: C3.2 D1.1 D2.1 D3.1 D4.1 D5.2 DS1.1 DS1.5 Q1.2 TP1.1 U4.1 U4.5 | length 124.5
  Top Layer w0.381: v1(70.721,10.15) 88.163,10.15 DS1.1 91.365,9.838 98.635,9.838 DS1.5 122.88,8.393 D1.1 125.559,8.084 125.559,17.714 D2.1 125.559,20.084 125.559,29.714 D3.1 125.559,32.084 125.559,41.714 D4.1
  Top Layer w0.508: v1(52.6,15.275) 52.617,15.293 57.673,15.293 v1(57.69,15.31)
  Bottom Layer w0.254: Q1.2 68.658,9.777 68.658,6.967 69.9,5.725 D5.2
  Bottom Layer w0.381: Q1.2 v1(70.721,10.15)
  Bottom Layer w0.508: v1(52.6,15.275) 52.605,15.27 52.605,12.53 U4.5 ; v1(57.69,15.31) U4.1 57.736,12.479 61.5,12.479 61.554,12.425 C3.2@64.746,12.425 ; C3.2@64.8,12.479 66.171,12.479 Q1.2@68.05,10.6
12V_HARNESS: C2.2 Q1.3 X1.1 X1.2 | length 25.3
  Bottom Layer w0.254: C2.2 65.602,19.248 67.927,19.248 Q1.3
  Bottom Layer w0.508: Q1.3 Q1.3@71.561,15.614 ; Q1.3@71.436,17.864 X1.1 X1.2
B1_Conditioned: U2.6 U5.17 | length 26.2
  Bottom Layer w0.254: U5.17 58.925,38.875 64.05,33.75 U2.6
B1_Harness: R18.1 X1.22 | length 17.9
  Bottom Layer w0.254: R18.1 83.339,33.975 87.169,30.145 89.451,30.145 90.639,28.957 91.827,28.957 X1.22
B2_Conditioned: U2.4 U5.18 | length 26.8
  Bottom Layer w0.254: U5.18 41.114,38.375 41.606,37.883 58.017,37.883 64.05,31.85 U2.4
B2_Harness: R17.1 X1.21 | length 13.6
  Bottom Layer w0.254: R17.1 76.125,30.617 76.423,30.319 86.277,30.319 87.639,28.957 88.827,28.957 X1.21
B3_Conditioned: U3.6 U5.16 | length 26.6
  Bottom Layer w0.254: U5.16@38.281,40.875 38.96,40.196 63.274,40.196 64,39.47 U3.6
B3_Harness: R20.1 X1.24 | length 26.7
  Bottom Layer w0.254: R20.1 78.159,40.592 87.59,31.161 95.623,31.161 X1.24
B4_Conditioned: U3.4 U5.15 | length 28.4
  Bottom Layer w0.254: U5.15 37.75,40.011 38.355,39.406 62.164,39.406 64,37.57 U3.4
B4_Harness: R19.1 X1.23 | length 22.3
  Bottom Layer w0.254: R19.1 80.749,37.283 87.379,30.653 93.131,30.653 X1.23
CAN_N: R22.2 U1.6 X1.14 | length 20.5
  Bottom Layer w0.381: U1.6 69.59,27.335 69.908,27.017 76.563,27.017 79.899,23.681 85.737,23.681 X1.14
CAN_P: R21.1 U1.7 X1.8 | length 20.5
  Bottom Layer w0.381: U1.7 69.59,26.065 69.908,26.382 76.299,26.382 79.635,23.046 85.738,23.046 X1.8
CBUS0: D8.2 U6.23 | length 16
  Top Layer w0.254: v1(10.175,15.1) 15.85,20.775 v1(17.125,20.775)
  Bottom Layer w0.254: D8.2 9.7,10.875 10.123,11.298 10.123,15.048 v1(10.175,15.1) ; U6.23 v1(17.125,20.775)
CBUS1: D9.2 U6.22 | length 16.1
  Top Layer w0.254: v1(5.75,15.1) 10.75,20.1 v1(12.5,20.1)
  Bottom Layer w0.254: D9.2 4.6,10.875 5.023,11.298 5.023,14.373 v1(5.75,15.1) ; v1(12.5,20.1) 12.513,20.113 14.937,20.113 U6.22
GND: C1.2 C2.1 C3.1 C4.1 C6.2 C7.2 C8.1 C9.1 C10.1 C11.1 C12.1 C14.1 C15.1 D6.3 D7.3 LCD1.1 M1.2 M2.2 M3.2 M4.2 M5.2 M6.2 M7.2 M8.2 M9.2 M10.2 M11.2 M12.2 M13.2 pad.0 pad.5 R5.1 R6.1 R7.1 R8.1 R23.1 R24.1 R26.1 R27.1 R28.1 R29.1 R30.1 R31.1 R32.1 R33.1 R34.1 R36.1 U1.2 U2.2 U3.2 U4.3 U5.10 U5.40 U6.7 U6.8 U6.18 U6.21 U6.24 U6.25 U6.26 X1.3 X1.4 X1.5 X1.6 X1.7 X1.9 X1.10 X1.11 X1.12 X1.13 X1.15 X1.16 X1.17 X1.18 X1.19 X1.20 X2.3 X2.5 | length 4.6
  Bottom Layer w0.254: U6.24 U6.25 U6.26 ; U6.8 U6.7 ; U5.40 34.75,28.511 34.852,28.409 34.852,27.098 C9.1@35.059,26.891
  Bottom Layer w0.508: C3.1@64.821,11.45 C3.1@64.875,11.504
  other v1: 68.2,2.5 4.4,5.9 63.6,6 102.8,10.3 55.1,10.4 27.8,12.6 36.9,13.592 79.635,13.75 24.5,17.1 49.2,17.4 61.29,17.8 108.5,17.991 78.8,20.775 17.258,22.9 51.249,23.703 37.475,25.402 11.488,26.6 66.125,26.917 79.899,27.9 108.4,28.041 26.8,29.068 69.6,30.4 79.3,31.325 36.8,33.031 7.2,34.6 51.6,34.875 44.3,35.844 101.725,36.2 32.4,36.375 18.825,39.8 69.102,41.025 54.8,41.4 56.8,47.1 33.957,49.3
JTAG_RST: C13.1 R39.1 U5.63 X2.10 | length 13.4
  Bottom Layer w0.254: C13.1@18.725,41.825 18.725,41.775 19.177,41.323 21.752,41.323 R39.1 ; X2.10 22.025,38.465 R39.1@22.025,41.025 ; X2.10@22.025,38.34 24.928,38.34 25.225,38.637 27.624,38.637 27.886,38.375 U5.63
JTAG_TCLK: U5.62 X2.4 | length 8.9
  Top Layer w0.254: v1(24.35,34.55) 25.3,35.5 25.3,36.7 v1(26.475,37.875)
  Bottom Layer w0.254: X2.4 21.91,34.54 24.34,34.54 v1(24.35,34.55) ; v1(26.475,37.875) U5.62
JTAG_TDI: U5.61 X2.8 | length 7
  Bottom Layer w0.254: X2.8 27.581,37.07 27.886,37.375 U5.61
JTAG_TDO: U5.58 X2.6 | length 6.9
  Bottom Layer w0.254: X2.6 21.975,35.875 U5.58
JTAG_TMS: R38.1 U5.64 X2.2 | length 17.6
  Top Layer w0.254: v1(25.2,33.225) 27.35,33.225 v1(30.6,36.475)
  Bottom Layer w0.254: X2.2 22.72,33.26 X2.2@22.738,33.242 ; R38.1@23.675,29.75 23.675,30.606 22.973,31.308 22.973,33.007 X2.2@22.738,33.242 ; v1(25.2,33.225) 25.183,33.242 X2.2@22.738,33.242 ; U5.64 29.614,38.875 30.6,37.889 v1(30.6,36.475)
LCD_BL: M13.1 R36.2 U5.46 | length 22.3
  Bottom Layer w0.254: M13.1 24.181,10.302 25.483,11.604 25.483,13.829 R36.2 25.781,14.177 31.742,20.138 31.742,25.524 31.758,25.54 31.758,28.503 31.75,28.511 U5.46
LCD_RESET: LCD1.17 U5.34 | length 49.9
  Bottom Layer w0.254: LCD1.17 25.58,4.55 42.825,4.55 43.7,5.425 43.7,25.85 42.275,27.275 38.675,27.275 37.75,28.2 U5.34
LCD_SPI_CLK: LCD1.6 U5.32 | length 36.3
  Bottom Layer w0.254: U5.32@40.25,31.344 43.556,31.344 44.675,30.225 44.675,7.761 47.682,4.753 49.217,4.753 LCD1.6
LCD_SPI_CS: LCD1.4 U5.31 | length 41.8
  Bottom Layer w0.254: U5.31 44.7,31.875 46.55,30.025 46.55,7.322 48.103,5.769 53.281,5.769 LCD1.4
LCD_SPI_SDA: LCD1.5 U5.33 | length 40.7
  Top Layer w0.254: v1(41.875,30.35) 45.075,30.35 v1(45.7,29.725)
  Bottom Layer w0.254: U5.33@38.281,29.375 39.256,30.35 v1(41.875,30.35) ; v1(45.7,29.725) 45.7,7.454 47.893,5.261 51.249,5.261 LCD1.5
LDO_ADJ: C5.1 R25.1 R26.2 U4.4 | length 10.5
  Bottom Layer w0.254: R26.2 R25.1 53.15,8.625 C5.1 53.25,8.675 53.573,8.998 53.573,9.048 53.88,9.355 U4.4
LED1: M3.1 R8.2 U5.1 | length 98.6
  Top Layer w0.254: v1(29.775,42.8) 30.362,42.213 47.263,42.213 50.533,45.483 v1(105.8,45.483)
  Bottom Layer w0.254: v1@30,42.7 29.872,42.572 29.872,42.278 30.727,41.423 30.727,40.898 U5.1 ; v1(105.8,45.483) 107.842,45.483 116.203,37.122 116.552,37.122 116.85,36.824 R8.2 116.823,36.747 116.823,33.172 M3.1
LED2: M4.1 R7.2 U5.2 | length 93.3
  Top Layer w0.254: v1(31.375,42.975) 34.899,46.499 56.323,46.499 56.484,46.338 57.116,46.338 57.277,46.499 v1(105.8,46.499)
  Bottom Layer w0.254: U5.2 v1@31.25,42.7 ; v1(105.8,46.499) 115,46.499 116.55,44.949 M4.1 116.823,45.172 116.823,48.747 R7.2
LED3: M1.1 R5.2 U5.3 | length 118.7
  Top Layer w0.254: v1(31.7,38.325) 32.487,37.538 49.86,37.538 55.773,43.451 v1(105.8,43.451)
  Bottom Layer w0.254: v1(31.7,38.325) 31.75,38.375 U5.3 ; v1(105.8,43.451) 111.225,38.026 111.225,18.449 116.823,12.851 116.823,9.172 M1.1
LED4: M2.1 R6.2 U5.4 | length 107.1
  Top Layer w0.254: v1(33.175,38.3) 47.1,38.3 53.267,44.467 v1(105.8,44.467)
  Bottom Layer w0.254: U5.4 32.25,40.011 33.175,39.086 v1(33.175,38.3) ; v1(105.8,44.467) 106.933,44.467 113.4,38 113.4,28.274 116.85,24.824 R6.2 116.823,24.747 116.823,21.172 M2.1
LED_Negative_U_LED_Driver1: M12.3 R10.1 | length 78.6
  Top Layer w0.254: v1(27.7,9.2) 31.8,9.2 32.913,8.087 81.682,8.087 v1(87.169,2.6)
  Bottom Layer w0.254: v1(27.7,9.2) 28.648,8.252 M12.3 ; v1@87.2,2.6 96.425,2.6 99.275,5.45 R10.1
LED_Negative_U_LED_Driver2: M9.3 R13.1 | length 59.8
  Top Layer w0.254: v1(40.526,10.626) 43.274,10.626 45.305,8.595 82.874,8.595 87.138,4.331 v1@87.2,4.331
  Bottom Layer w0.254: M9.3 v1(40.526,10.626) ; v1@87.2,4.4 92.754,4.4 93.727,3.427 94.472,3.427 R13.1
  other v1: 87.169,4.3
LED_Negative_U_LED_Driver3: M10.3 R14.1 | length 56.6
  Top Layer w0.254: v1(40.525,15.5) 43,15.5 49.319,9.181 83.988,9.181 v1(87.169,6)
  Bottom Layer w0.254: M10.3 v1(40.525,15.5) ; v1(87.169,6) 90.3,6 R14.1
LED_Negative_U_LED_Driver4: M11.3 R9.2 | length 74.1
  Top Layer w0.254: v1(40.525,20.293) 50.493,20.293 62.9,32.7 92.55,32.7 v1(101.725,41.875)
  Bottom Layer w0.254: M11.3 v1(40.525,20.293) ; v1(101.725,41.875) R9.2
LED_Negative_U_LED_Driver5: M8.3 R11.2 | length 68.7
  Top Layer w0.254: v1(40.532,25.332) 54.332,25.332 63.531,34.531 91.006,34.531 v1(98.375,41.9)
  Bottom Layer w0.254: M8.3 v1(40.532,25.332) ; v1(98.375,41.9) R11.2
LED_Negative_U_LED_Driver6: M5.3 R12.2 | length 52.2
  Top Layer w0.254: v1(57.7,30.4) 63.45,36.15 89.25,36.15 v1(95,41.9)
  Bottom Layer w0.254: M5.3 55.298,23.2 57.7,25.602 v1(57.7,30.4) ; R12.2@94.9,43.65 R12.2 v1(95,41.9)
LED_Negative_U_LED_Driver7: M6.3 R15.2 | length 45.9
  Top Layer w0.254: v1(56.9,32.4) 62,37.5 87.225,37.5 v1(91.6,41.875)
  Bottom Layer w0.254: M6.3 55.252,27.8 55.352,27.7 56.9,29.248 v1(56.9,32.4) ; v1(91.6,41.875) R15.2
LED_Negative_U_LED_Driver8: M7.3 R16.2 | length 39.1
  Top Layer w0.254: v1(56.1,34.375) 60.525,38.8 84.95,38.8 v1(88.075,41.925)
  Bottom Layer w0.254: M7.3 56.1,33.348 v1(56.1,34.375) ; v1(88.075,41.925) R16.2
LED_Negative_U_LED_Driver9: LCD1.20 M13.3 | length 20.5
  Bottom Layer w0.254: LCD1.20 14.14,5.81 14.14,8.229 16.992,11.081 21.108,11.081 23.614,8.575 24.858,8.575 25.131,8.302 M13.3
LED_Negative_U_LED_Driver10: M2.3 R2.2 | length 7.2
  Bottom Layer w0.254: M2.3 117.5,18.949 118.619,20.068 119.008,20.068 122.102,23.162 122.102,23.352 R2.2
LED_Negative_U_LED_Driver11: M1.3 R1.2 | length 7.2
  Bottom Layer w0.254: M1.3 117.5,6.949 118.619,8.068 119.008,8.068 122.102,11.162 122.102,11.327 R1.2
LED_Negative_U_LED_Driver12: M4.3 R4.2 | length 7.2
  Bottom Layer w0.254: M4.3 117.5,42.949 118.619,44.068 119.008,44.068 122.102,47.162 122.102,47.32 R4.2
LED_Negative_U_LED_Driver13: M3.3 R3.2 | length 7.2
  Bottom Layer w0.254: M3.3 117.5,30.949 118.619,32.068 119.008,32.068 122.102,35.162 122.102,35.352 R3.2
NetC6_2: C13.2 U6.2 | length 26.1
  Top Layer w0.254: v1(14.725,39.175) 14.725,33.275 v1(24.625,23.375)
  Bottom Layer w0.254: v1(14.725,39.175) 14.775,39.175 17.375,41.775 C13.2@17.375,41.825 ; U6.2 v1(24.625,23.375)
NetD1_1: D8.1 R41.1 | length 3.2
  Bottom Layer w0.254: D8.1 10.023,8.152 10.448,8.152 11.925,6.675 R41.1
NetD2_1: D9.1 R42.1 | length 3.3
  Bottom Layer w0.254: D9.1 4.923,8.152 5.523,8.152 7,6.675 R42.1
NetD3_1: D5.1 Q1.1 R23.2 | length 15.6
  Bottom Layer w0.254: R23.2@65.325,16.15 65.623,15.852 65.623,15.038 67.642,13.019 70.996,13.019 72.865,11.15 72.865,5.69 D5.1
NetD4_2: D3.2 R3.1 | length 2.4
  Bottom Layer w0.254: R3.1 124.374,35.726 D3.2
NetD5_2: D4.2 R4.1 | length 2.4
  Bottom Layer w0.254: R4.1 124.374,47.694 D4.2
NetD6_2: D1.2 R1.1 | length 2.4
  Bottom Layer w0.254: R1.1 124.374,11.701 D1.2
NetD7_2: D2.2 R2.1 | length 2.4
  Bottom Layer w0.254: R2.1 124.374,23.726 D2.2
NetD8_1: D6.1 R18.2 U2.1 | length 7.9
  Bottom Layer w0.254: U2.1 72.075,33.75 D6.1 72.3,33.975 R18.2
NetD8_2: D6.2 R17.2 U2.3 | length 8.4
  Bottom Layer w0.254: U2.3 72.075,31.85 D6.2 73.617,31.875 74.477,31.015 74.527,31.015 74.825,30.717 R17.2
NetD9_1: D7.1 R20.2 U3.1 | length 8.4
  Bottom Layer w0.254: U3.1 72.07,39.47 D7.1 73.733,39.5 74.477,40.244 74.527,40.244 74.825,40.542 R20.2
NetD9_2: D7.2 R19.2 U3.3 | length 8
  Bottom Layer w0.254: U3.3 72.07,37.57 D7.2 74.527,37.6 74.825,37.302 R19.2
NetR14_1: R37.1 U6.5 | length 7.9
  Bottom Layer w0.254: U6.5 22.176,21.449 21.217,21.449 20.994,21.672 20.994,24.428 21.968,25.402 23.927,25.402 24.225,25.7 R37.1
NetR15_1: R35.1 U6.1 | length 6.2
  Bottom Layer w0.254: U6.1 22.312,24.137 28.163,24.137 R35.1
P1_Conditioned: C6.1 U5.14 X1.25 | length 70.6
  Bottom Layer w0.254: U5.14 37.25,41.739 37.273,41.762 37.273,41.98 37.732,42.439 77.03,42.439 87.8,31.669 98.115,31.669 X1.25
P2_Conditioned: C7.1 U5.13 X1.26 | length 75.8
  Bottom Layer w0.254: U5.13 36.75,42.176 38.951,44.377 45.8,44.377 75.811,44.377 88.011,32.177 99.419,32.177 102.639,28.957 103.827,28.957 X1.26
RXCAN: U1.4 U5.21 | length 26.9
  Bottom Layer w0.254: U5.21 44.65,36.875 ; 44.65,36.867 55.013,36.867 63.275,28.605 U1.4
SPLIT: C1.1 R21.2 R22.1 U1.5 | length 14.2
  Bottom Layer w0.254: R21.2 72.2,24.675 70.498,22.973 69.748,22.973 69.425,22.65 C1.1 69.102,22.923 69.102,23.455 68.044,24.513 68.044,27.924 68.725,28.605 72.08,28.605 R22.1
STBY: R24.2 U1.8 | length 12.6
  Top Layer w0.254: v1(63.4,22.6) 65.648,24.847 v1(70.697,24.847)
  Bottom Layer w0.254: R24.2 60.865,22.6 v1(63.4,22.6) ; U1.8@69.15,24.9 69.203,24.847 v1(70.697,24.847)
TXCAN: U1.1 U5.20 | length 32.9
  Bottom Layer w0.254: U5.20 56.318,37.375 64.806,28.887 64.806,25.476 64.125,24.795 U1.1
USB_DM: pad.2 U6.16 | length 16.7
  Bottom Layer w0.254: pad.2@3.7,27.25 3.769,27.181 4.518,27.181 9.242,22.456 9.242,20.974 13.967,16.249 14.926,16.249 U6.16
USB_DP: pad.3 U6.15 | length 16.7
  Bottom Layer w0.254: pad.3@3.7,26.6 3.769,26.531 4.449,26.531 8.734,22.246 8.734,20.763 13.899,15.599 14.926,15.599 U6.15
USB_UART_RX: R37.2 U5.48 | length 8.2
  Bottom Layer w0.254: R37.2 29.649,25.75 30.719,26.82 U5.48@30.719,29.375
USB_UART_TX: R35.2 U5.47 | length 6
  Bottom Layer w0.254: R35.2 29.575,24.075 31.25,25.75 U5.47
Vo_LCD: LCD1.3 R40.1 | length 44.4
  Top Layer w0.254: v1(18.65,5.925) 55.665,5.925 LCD1.3
  Bottom Layer w0.254: R40.1 17.75,6.825 v1(18.65,5.925)
Vout_LCD: LCD1.18 R40.2 R40.3 | length 10.3
  Bottom Layer w0.254: R40.3 18.75,9.1 R40.2 20.99,9.09 LCD1.18
pads on no net: LCD1. LCD1.7 LCD1.8 LCD1.9 LCD1.10 LCD1.11 LCD1.12 LCD1.13 LCD1.14 LCD1.15 LCD1.16 LCD1.21 LCD1.22 LCD1.23 LCD1.24 U4. U5.5 U5.6 U5.11 U5.12 U5.19 U5.22 U5.23 U5.24 U5.28 U5.29 U5.30 U5.38 U5.39 U5.42 U5.43 U5.49 U5.50 U5.51 U5.52 U5.53 U5.54 U5.55 U5.56 U5.57 U5.59 U5.60 U6.3 U6.6 U6.9 U6.10 U6.11 U6.12 U6.13 U6.14 U6.27 U6.28 X1.27 X2.7 X2.9 X2.MH1 X2.MH2

## Polygon pours and split planes (outlines as drawn)
GND on Top Layer "Bottom Layer-No Net 1" (solid, pour order 0): 130,60 -10,60 -10,-10 130,-10
GND on Bottom Layer "Bottom Layer-No Net" (solid, pour order 2): 130,60.1 -10,60.1 -10,-9.9 130,-9.9

## Silkscreen, mask and mechanical layers (free items; w line width, h text height)
Top Overlay:
  text "Dashboard" at 133.4,47.4 h2
  text "REV 1.0 (11/2019)" at 133.35,45.1 h1
  text "Design and Layout by: / Kevin Jung / Lynette Cox" at 157.25,43.451 h1
  text "FA" at 5.575,16.425 h30
  text "a" at 135.1,-9 h40
Bottom Overlay:
  lines w0.2: -0.055,22.995 2.345,22.995 2.345,25.155 -0.055,25.155 ; -0.05,21.8 -0.05,31.25 ; -0.05,27.895 2.35,27.895 2.35,30.055 -0.05,30.055
Mechanical 15:
  the board outline again, w0.254

## Text inside footprints (layer, text, board x,y; h text height)
D8: Bottom Overlay "*" at 10.108,11.249 h1.52 r270
D9: Bottom Overlay "*" at 5.008,11.249 h1.52 r270